# EAGLE board sensorstation_ok1 (EAGLE 6.2)
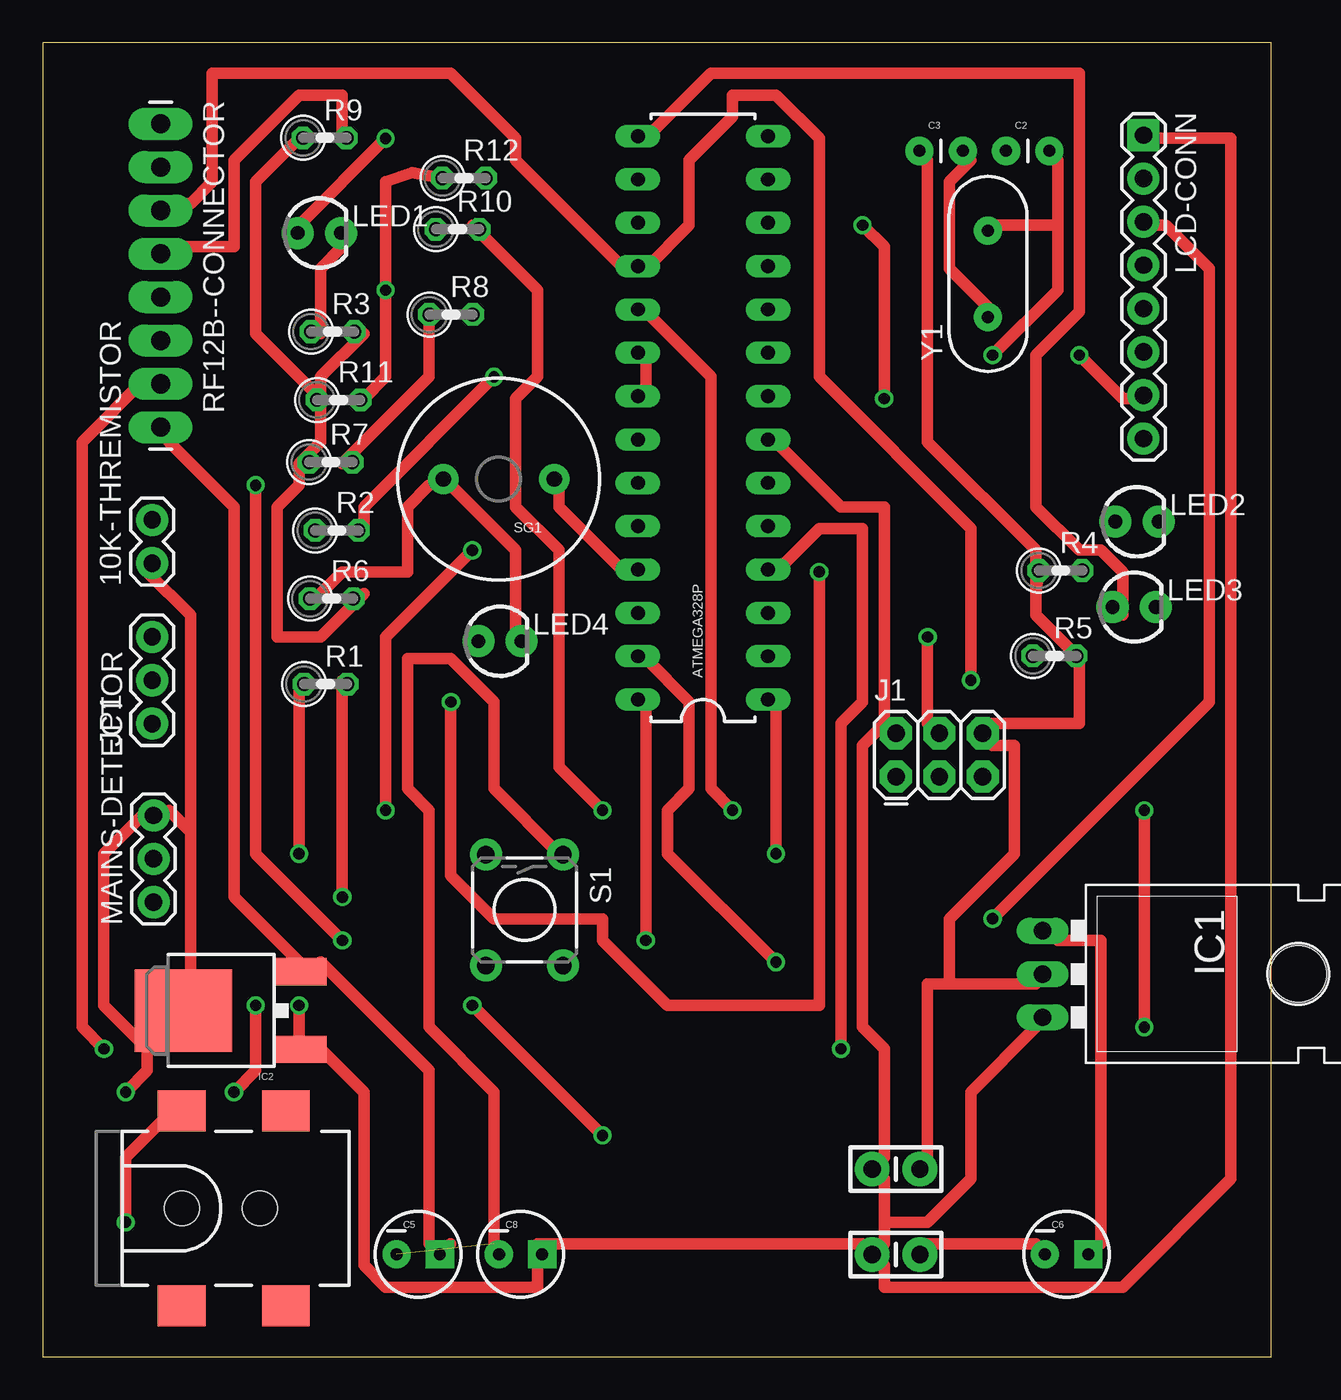
[diagram p0: board, top side]
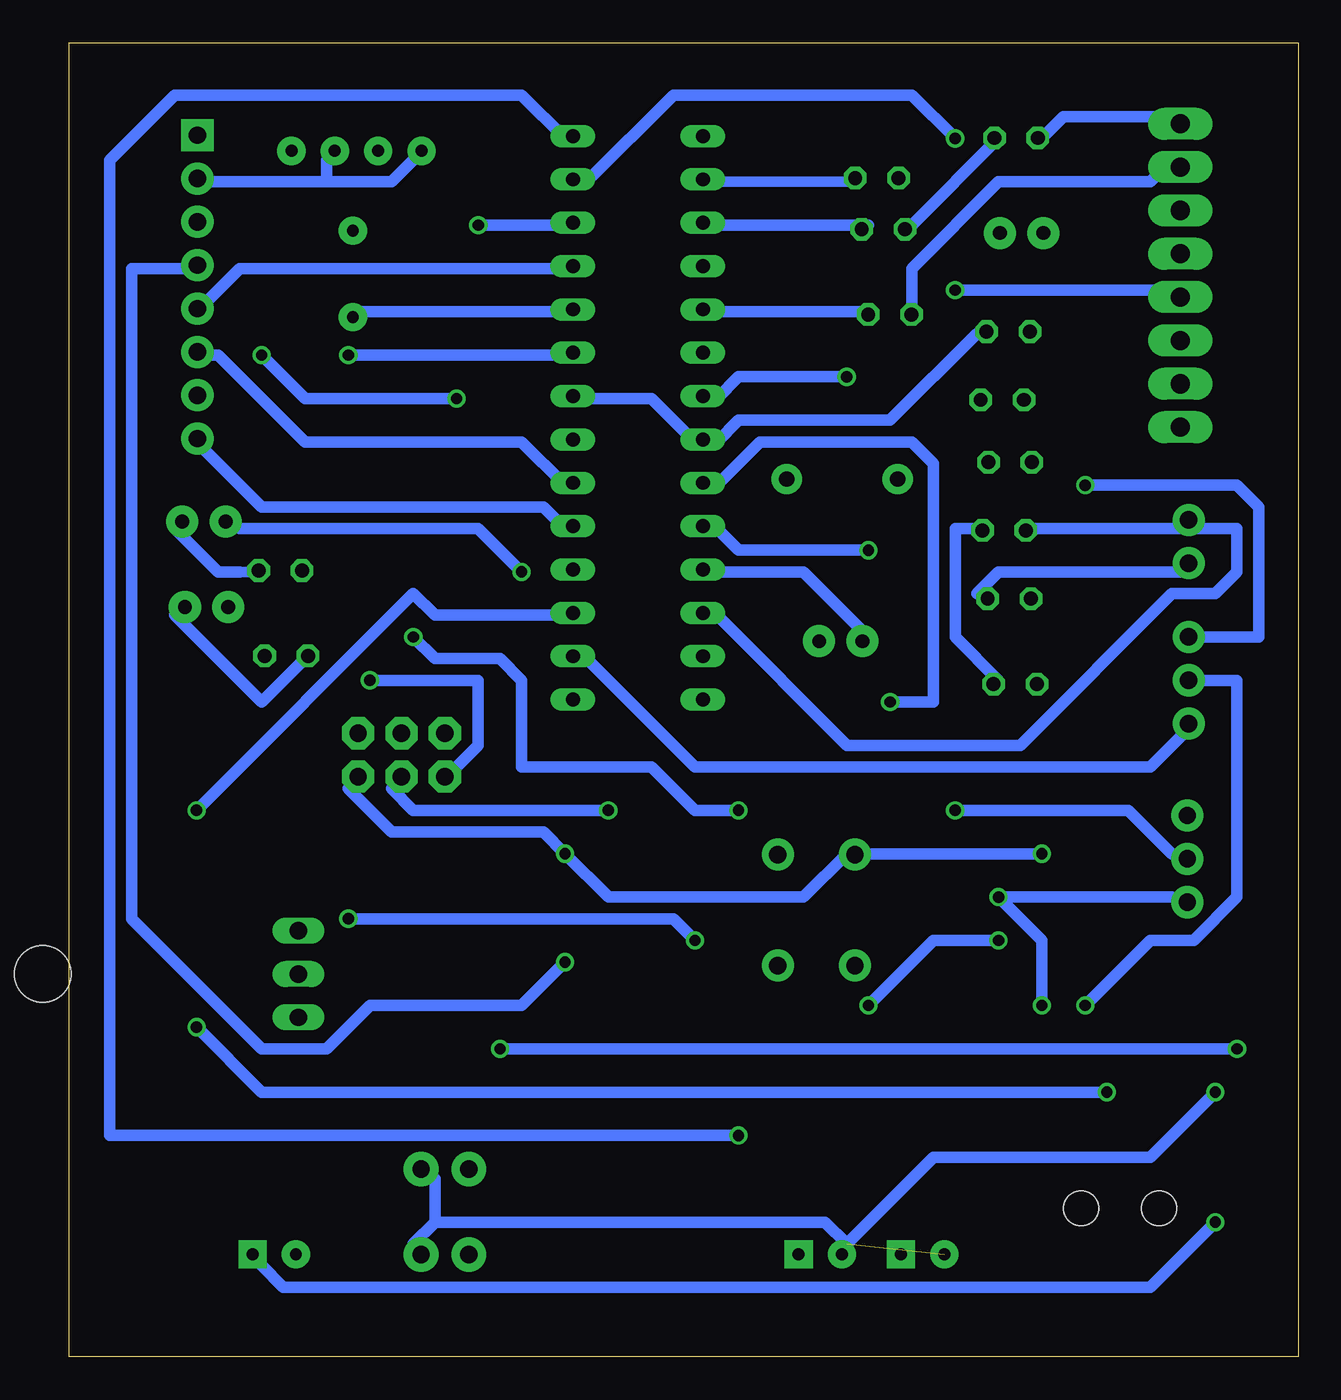
[diagram p1: board, bottom side, seen from below]

Size 72 x 77 mm. Coordinates in mm from the lower left corner, seen from the top.
Outline: 0,0 72,0 72,77 0,77 0,0
Copper layers (1*16): Top 0.035mm / dielectric 1.5mm / Bottom 0.035mm
Design rules: minimum track width 26mil, minimum drill 26mil, track to track 10mil, track to pad 20mil, pad to pad 10mil, via to via 20mil, smd to smd 8mil, copper to edge 40mil, drill to drill 8mil, minimum pad ring 10mil, minimum via ring 8mil, stop-mask expansion 4mil, vias tented up to drill 0mil, thermal gap 10mil

## Footprints (pad centres in the part's own frame; a part is rotated, then mirrored left to right if it is on the bottom)
1X02 = drill 1.016 pad 1.88: 1 0,0; 2 2.54,0
DIL28-3 = drill 0.813 long: 1 -16.51,-3.81; 2 -13.97,-3.81; 3 -11.43,-3.81; 4 -8.89,-3.81; 5 -6.35,-3.81; 6 -3.81,-3.81; 7 -1.27,-3.81; 8 1.27,-3.81; 9 3.81,-3.81; 10 6.35,-3.81; 11 8.89,-3.81; 12 11.43,-3.81; 13 13.97,-3.81; 14 16.51,-3.81; 15 16.51,3.81; 16 13.97,3.81; 17 11.43,3.81; 18 8.89,3.81; 19 6.35,3.81; 20 3.81,3.81; 21 1.27,3.81; 22 -1.27,3.81; 23 -3.81,3.81; 24 -6.35,3.81; 25 -8.89,3.81; 26 -11.43,3.81; 27 -13.97,3.81; 28 -16.51,3.81
CAP-PTH-SMALL = drill 0.7 pad 1.651: 1 0,0; 2 2.54,0
CAP-PTH-SMALL-KIT = drill 1.016 pad 2.032: 1 -1.397,0; 2 1.397,0
CPOL-RADIAL-10UF-25V = drill 0.7 pad 1.651 square: 1 1.27,0 | drill 0.7 pad 1.651: 2 -1.27,0
TO-220-ALT = drill 1.016 long: GND 0,-3.81; IN -2.54,-3.81; OUT 2.54,-3.81 | hole 3.302: 0,11.176
DPAK = smd 1.6 x 3: 1 -2.28,-5.31; 3 2.28,-5.31 | smd 4.826 x 5.715: 4 0,1.588
2X3 = drill 1.016 pad 1.88 octagon: 1 0,0; 2 0,2.54; 3 2.54,0; 4 2.54,2.54; 5 5.08,0; 6 5.08,2.54
POWER_JACK_SMD = smd 2.8 x 2.4: GND 0,-5.7; P$4 6.1,-5.7; VIN0 0,5.7; VIN1 6.1,5.7 | hole 2.032: 0,0; 4.572,0
1X03 = drill 1.016 pad 1.88: 1 0,0; 2 2.54,0; 3 5.08,0
1X08 = drill 1.016 pad 1.88 square: 1 0,0 | drill 1.016 pad 1.88: 2 2.54,0; 3 5.08,0; 4 7.62,0; 5 10.16,0; 6 12.7,0; 7 15.24,0; 8 17.78,0
LED3MM = drill 0.813 pad 1.88: A -1.27,0; K 1.27,0
0207/2V = drill 0.813 octagon: 1 -1.27,0; 2 1.27,0
1X08_LONGPADS = drill 1.118 pad 1.88 long: 1 0,0; 2 2.54,0; 3 5.08,0; 4 7.62,0; 5 10.16,0; 6 12.7,0; 7 15.24,0; 8 17.78,0
TACTILE-PTH = drill 1.016 pad 1.88: 1 -3.251,2.261; 2 3.251,2.261; 3 -3.251,-2.261; 4 3.251,-2.261
BUZZER-12MM = drill 0.9 pad 1.778: + 3.25,0; - -3.25,0
HC49US = drill 0.7 pad 1.651: 1 -2.54,0; 2 2.54,0

## Placement (x,y rotation side)
10K-THREMISTOR  J2  [1X02]  6.42,46.5 90 top
ATMEGA328P  AVR-MEGA8-PPTH  [DIL28-3]  38.69,55.02 90 top
C2  22pf  [CAP-PTH-SMALL]  56.45,70.66 0 top
C3  22pf  [CAP-PTH-SMALL]  51.37,70.66 0 top
C4  0,47uF  [CAP-PTH-SMALL-KIT]  50,11 0 top
C5  33uF  [CPOL-RADIAL-10UF-25V]  22,6 0 top
C6  33uF  [CPOL-RADIAL-10UF-25V]  60,6 0 top
C7  0,1uF  [CAP-PTH-SMALL-KIT]  50,6 0 top
C8  33uF  [CPOL-RADIAL-10UF-25V]  28,6 0 top
IC1  LM7805  [TO-220-ALT]  62.39,22.43 270 top
IC2  LM2931_FIXED  [DPAK]  9.83,20.29 90 top
J1  AVR_SPI_PRG_6PTH  [2X3]  50,34 0 top
J2  POWER_JACKSMD  [POWER_JACK_SMD]  8.15,8.7 0 top
JP1  J6  [1X03]  6.42,37.1 90 top
LCD-CONN  J5  [1X08]  64.5,71.58 270 top
LED1  MainsI  [LED3MM]  16.21,65.85 0 top
LED2  Led1  [LED3MM]  64.12,48.93 0 top
LED3  Led2  [LED3MM]  63.96,43.93 0 top
LED4  ToneLed  [LED3MM]  26.8,41.93 0 top
MAINS-DETECTOR  J3  [1X03]  6.5,26.64 90 top
R1  10k  [0207/2V]  16.58,39.42 0 top
R2  10k  [0207/2V]  17.23,48.42 0 top
R3  330  [0207/2V]  16.99,60.07 0 top
R4  330  [0207/2V]  59.64,46.07 0 top
R5  330  [0207/2V]  59.29,41.07 0 top
R6  330  [0207/2V]  16.93,44.42 0 top
R7  10k  [0207/2V]  16.88,52.42 0 top
R8  4,7k  [0207/2V]  23.93,61.07 0 top
R9  10k  [0207/2V]  16.53,71.42 0 top
R10  4,7k  [0207/2V]  24.31,66.07 0 top
R11  10k  [0207/2V]  17.34,56.07 0 top
R12  4,7k  [0207/2V]  24.69,69.07 0 top
RF12B--CONNECTOR  J4  [1X08_LONGPADS]  6.91,72.25 270 top
S1  [TACTILE-PTH]  28.23,26.18 270 top
SG1  BUZZERPTH  [BUZZER-12MM]  26.72,51.43 180 top
Y1  16Mhz  [HC49US]  55.39,63.45 90 top

## Library data of the parts
10K-THREMISTOR ATMEGA328P C2-C8 IC1 IC2 J1 J2 JP1 LCD-CONN LED1-LED4 MAINS-DETECTOR RF12B--CONNECTOR S1 SG1 Y1 = SparkFun
R1-R12 = resistor

## Nets
3.3V: C5.1 IC2.3 RF12B--CONNECTOR.8
5V: ATMEGA328P.7 ATMEGA328P.20 ATMEGA328P.21 C4.1 C7.1 C8.1 IC1.OUT IC2.1 J1.2 LCD-CONN.1 MAINS-DETECTOR.1 R1.2 R2.2
GND: 10K-THREMISTOR.1 ATMEGA328P.8 ATMEGA328P.22 C2.1 C3.1 C4.2 C5.2 C6.2 C7.2 C8.2 IC1.GND IC2.4 J1.6 LCD-CONN.2 MAINS-DETECTOR.3 R3.2 R4.1 R5.2 R6.2 R7.1 R9.1 R11.1 RF12B--CONNECTOR.1 S1.1
N$1: ATMEGA328P.4 RF12B--CONNECTOR.7
N$2: C6.1 IC1.IN J2.VIN0
N$3: ATMEGA328P.19 J1.3 R8.2
N$4: ATMEGA328P.17 J1.4 R10.2
N$6: ATMEGA328P.9 C2.2 Y1.2
N$7: ATMEGA328P.10 C3.2 Y1.1
N$8: ATMEGA328P.24 MAINS-DETECTOR.2
N$9: 10K-THREMISTOR.2 ATMEGA328P.26 R2.1
N$10: LED1.K R3.1
N$11: LED4.K R6.1 SG1.+
N$12: LED2.K R4.2
N$13: LED3.K R5.1
N$14: ATMEGA328P.23 LED2.A
N$15: ATMEGA328P.15 LED3.A
N$16: ATMEGA328P.25 LED4.A SG1.-
N$17: ATMEGA328P.14 JP1.3
N$18: R7.2 R8.1 RF12B--CONNECTOR.2
N$19: R9.2 R10.1 RF12B--CONNECTOR.4
N$20: R11.2 R12.1 RF12B--CONNECTOR.5
N$21: ATMEGA328P.16 R12.2
N$22: ATMEGA328P.13 LED1.A
N$23: ATMEGA328P.18 J1.1 RF12B--CONNECTOR.3
N$24: ATMEGA328P.12 LCD-CONN.7
N$25: ATMEGA328P.11 LCD-CONN.5
N$26: ATMEGA328P.6 LCD-CONN.6
N$27: ATMEGA328P.5 LCD-CONN.8
N$28: ATMEGA328P.3 JP1.2
N$29: ATMEGA328P.2 JP1.1
N$30: ATMEGA328P.27 LCD-CONN.4
N$31: ATMEGA328P.28 LCD-CONN.3
N$34: ATMEGA328P.1 J1.5 R1.1 S1.3

## Tracks (layer width: path | path; a pad name or v marks a point on that pad's centre or on a via)
3.3V
  Top 0.66: 23.91,6.62 C5.1 22.64,6.62 22.64,16.78 16.29,23.13 IC2.3 15.02,23.13 11.21,26.94 11.21,49.8 7.4,53.61 RF12B--CONNECTOR.8
5V  (via drill 0.66)
  Top 0.66: ATMEGA328P.21 35.34,56.15 35.34,58.69 ATMEGA328P.20 | v26.45,57.42 18.83,49.8 18.83,48.53 R2.2 | v17.56,26.94 17.56,39.64 R1.2 | 49.31,37.1 49.31,49.8 46.77,49.8 42.96,53.61 ATMEGA328P.7 | 49.31,7.89 51.85,7.89 54.39,10.43 54.39,15.51 58.2,19.32 IC1.OUT | 49.31,7.89 49.31,6.62 C7.1 | LCD-CONN.1 64.55,71.39 69.63,71.39 69.63,10.43 63.28,4.08 49.31,4.08 49.31,5.35 C7.1 | 49.31,7.89 49.31,10.43 C4.1 49.31,11.7 49.31,18.05 48.04,19.32 48.04,35.83 49.31,37.1 | 49.31,37.1 J1.2 | C7.1 48.04,6.62 28.99,6.62 C8.1 28.99,5.35 28.99,4.08 20.1,4.08 18.83,5.35 18.83,15.51 16.29,18.05 IC2.1 15.02,18.05 v15.02,20.59
  Bottom 0.66: R1.2 17.56,39.64 20.1,42.18 20.1,48.53 18.83,48.53 R2.2 | v26.45,57.42 32.8,57.42 34.07,56.15 ATMEGA328P.21 | MAINS-DETECTOR.1 7.4,26.94 v17.56,26.94 15.02,24.4 v15.02,20.59
GND  (via drill 0.66)  (1 unrouted)
  Top 0.66: 8.67,30.75 7.4,32.02 MAINS-DETECTOR.3 6.13,32.02 3.59,29.48 3.59,20.59 6.13,18.05 6.13,16.78 v4.86,15.51 | 8.67,30.75 8.67,20.59 IC2.4 | 8.67,30.75 8.67,43.45 6.13,45.99 10K-THREMISTOR.1 | 15.02,52.34 16.29,53.61 16.29,56.15 | 16.29,56.15 16.29,57.42 18.83,59.96 R3.2 | 16.29,56.15 12.48,59.96 12.48,68.85 15.02,71.39 R9.1 | 16.29,56.15 R11.1 | 15.02,52.34 15.02,51.07 13.75,49.8 13.75,42.18 16.29,42.18 18.83,44.72 R6.2 | 15.02,52.34 R7.1 | C6.2 58.2,6.62 51.85,6.62 C7.2 | S1.1 30.26,29.48 26.45,33.29 26.45,38.37 23.91,40.91 21.37,40.91 21.37,33.29 22.64,32.02 22.64,19.32 26.45,15.51 26.45,6.62 C8.2 | 60.74,40.91 58.2,43.45 58.2,44.72 | 60.74,40.91 60.74,37.1 55.66,37.1 J1.6 55.66,35.83 56.93,35.83 56.93,29.48 53.12,25.67 53.12,21.86 | 60.74,40.91 R5.2 | 53.12,21.86 51.85,21.86 51.85,11.7 C4.2 | 53.12,21.86 58.2,21.86 IC1.GND | 58.2,44.72 58.2,47.26 51.85,53.61 51.85,70.12 C3.1 | 58.2,44.72 R4.1
  Bottom 0.66: R6.2 18.83,44.72 17.56,45.99 6.13,45.99 10K-THREMISTOR.1 | R9.1 15.02,71.39 13.75,72.66 7.4,72.66 RF12B--CONNECTOR.1 | ATMEGA328P.8 41.69,56.15 37.88,56.15 35.34,53.61 ATMEGA328P.22 34.07,53.61 32.8,54.88 23.91,54.88 18.83,59.96 R3.2 | 26.45,6.62 27.72,7.89 50.58,7.89 | 50.58,7.89 51.85,6.62 C7.2 | 56.93,68.85 64.55,68.85 LCD-CONN.2 | 56.93,68.85 53.12,68.85 51.85,70.12 C3.1 | 56.93,68.85 56.93,70.12 C2.1 | 50.58,7.89 50.58,10.43 C4.2 | v4.86,15.51 8.67,11.7 21.37,11.7 26.45,6.62 | 26.45,6.62 C8.2
N$1  (via drill 0.66)
  Top 0.66: v46.77,18.05 46.77,37.1 48.04,38.37 48.04,48.53 45.5,48.53 42.96,45.99 ATMEGA328P.4 | v3.59,18.05 2.32,19.32 2.32,53.61 6.13,57.42 RF12B--CONNECTOR.7
  Bottom 0.66: v3.59,18.05 v46.77,18.05
N$2  (via drill 0.66)
  Top 0.66: v4.86,7.89 4.86,11.7 7.4,14.24 J2.VIN0 | IC1.IN 59.47,24.4 62.01,24.4 62.01,6.62 C6.1
  Bottom 0.66: v4.86,7.89 8.67,4.08 59.47,4.08 60.74,5.35 C6.1
N$3  (via drill 0.66)
  Top 0.66: v40.42,32.02 39.15,33.29 39.15,57.42 35.34,61.23 ATMEGA328P.19
  Bottom 0.66: R8.2 25.18,61.23 34.07,61.23 ATMEGA328P.19 | v40.42,32.02 51.85,32.02 53.12,33.29 J1.3
N$4  (via drill 0.66)
  Top 0.66: v51.85,42.18 51.85,37.1 J1.4 | v32.8,32.02 30.26,34.56 30.26,47.26 27.72,49.8 27.72,56.15 28.99,57.42 28.99,62.5 25.18,66.31 R10.2
  Bottom 0.66: R10.2 25.18,66.31 34.07,66.31 ATMEGA328P.17 | v51.85,42.18 50.58,40.91 46.77,40.91 45.5,39.64 45.5,34.56 37.88,34.56 35.34,32.02 v32.8,32.02
N$6  (via drill 0.66)
  Top 0.66: v55.66,58.69 59.47,62.5 59.47,66.31 | 59.47,66.31 59.47,70.12 C2.2 | 59.47,66.31 55.66,66.31 Y1.2
  Bottom 0.66: v55.66,58.69 42.96,58.69 ATMEGA328P.9
N$7
  Top 0.66: C3.2 54.39,70.12 53.12,68.85 53.12,63.77 55.66,61.23 Y1.1
  Bottom 0.66: ATMEGA328P.10 42.96,61.23 55.66,61.23 Y1.1
N$8  (via drill 0.66)
  Top 0.66: v25.18,47.26 20.1,42.18 v20.1,32.02
  Bottom 0.66: v25.18,47.26 32.8,47.26 34.07,48.53 ATMEGA328P.24 | v20.1,32.02 9.94,32.02 7.4,29.48 MAINS-DETECTOR.2
N$9
  Bottom 0.66: 6.13,48.53 16.29,48.53 R2.1 | 6.13,48.53 3.59,48.53 3.59,45.99 4.86,44.72 7.4,44.72 16.29,35.83 26.45,35.83 34.07,43.45 ATMEGA328P.26 | 6.13,48.53 10K-THREMISTOR.2
N$10
  Top 0.66: R3.1 16.29,59.96 16.29,63.77 17.56,65.04 LED1.K
N$11
  Top 0.66: R6.1 16.29,44.72 17.56,45.99 21.37,45.99 21.37,49.8 22.64,51.07 SG1.+ 23.91,51.07 27.72,47.26 27.72,42.18 LED4.K
N$12
  Bottom 0.61: 62.01,45.99 60.91,45.99 R4.2
  Bottom 0.66: 62.01,45.99 63.28,45.99 65.82,48.53 LED2.K
N$13
  Bottom 0.66: R5.1 58.2,40.91 60.74,38.37 65.82,43.45 LED3.K
N$14  (via drill 0.66)
  Top 0.66: v23.91,38.37 23.91,28.21 26.45,25.67 32.8,25.67 32.8,24.4 36.61,20.59 45.5,20.59 v45.5,45.99
  Bottom 0.66: v23.91,38.37 21.37,38.37 21.37,52.34 22.64,53.61 31.53,53.61 34.07,51.07 ATMEGA328P.23 | v45.5,45.99 48.04,48.53 62.01,48.53 LED2.A
N$15
  Top 0.66: ATMEGA328P.15 35.34,71.39 39.15,75.2 60.74,75.2 60.74,61.23 58.2,58.69 58.2,49.8 60.74,47.26 62.01,47.26 63.28,45.99 63.28,43.45 LED3.A
N$16
  Top 0.66: ATMEGA328P.25 34.07,45.99 30.26,49.8 30.26,51.07 SG1.-
  Bottom 0.66: LED4.A 25.18,42.18 28.99,45.99 34.07,45.99 ATMEGA328P.25
N$17  (via drill 0.66)
  Top 0.66: v25.18,20.59 v32.8,12.97 | v17.56,24.4 12.48,29.48 v12.48,51.07
  Bottom 0.66: v32.8,12.97 69.63,12.97 69.63,70.12 65.82,73.93 45.5,73.93 42.96,71.39 ATMEGA328P.14 | v25.18,20.59 21.37,24.4 v17.56,24.4 | v12.48,51.07 3.59,51.07 2.32,49.8 2.32,42.18 JP1.3
N$18
  Top 0.66: R7.2 17.56,52.34 22.64,57.42 22.64,61.23 R8.1
  Bottom 0.66: RF12B--CONNECTOR.2 7.4,70.12 8.67,68.85 17.56,68.85 22.64,63.77 22.64,61.23 R8.1
N$19
  Top 0.66: RF12B--CONNECTOR.4 7.4,65.04 11.21,65.04 11.21,70.12 15.02,73.93 17.56,73.93 17.56,71.39 R9.2
  Bottom 0.66: R10.1 22.64,66.31 17.56,71.39 R9.2
N$20  (via drill 0.66)
  Top 0.66: R11.2 18.83,56.15 20.1,57.42 v20.1,62.5 20.1,68.85 21.64,69.39 R12.1
  Bottom 0.66: v20.1,62.5 7.4,62.5 RF12B--CONNECTOR.5
N$21
  Bottom 0.61: 34.07,68.85 25.96,68.85 R12.2
  Bottom 0.66: 34.07,68.85 ATMEGA328P.16
N$22  (via drill 0.66)
  Top 0.66: v20.1,71.39 15.02,66.31 LED1.A
  Bottom 0.66: v20.1,71.39 22.64,73.93 36.61,73.93 41.69,68.85 ATMEGA328P.13
N$23  (via drill 0.66)
  Top 0.66: RF12B--CONNECTOR.3 7.4,67.58 8.67,67.58 9.94,68.85 9.94,75.2 23.91,75.2 27.72,71.39 27.72,70.12 34.07,63.77 ATMEGA328P.18 35.34,63.77 37.88,66.31 37.88,70.12 40.42,72.66 40.42,73.93 42.96,73.93 45.5,71.39 45.5,57.42 54.39,48.53 v54.39,39.64
  Bottom 0.66: v54.39,39.64 48.04,39.64 48.04,35.83 49.31,34.56 J1.1
N$24  (via drill 0.66)
  Top 0.66: v48.04,66.31 49.31,65.04 v49.31,56.15 | v60.74,58.69 63.28,56.15 64.55,56.15 LCD-CONN.7
  Bottom 0.66: v48.04,66.31 42.96,66.31 ATMEGA328P.12 | v49.31,56.15 58.2,56.15 v60.74,58.69
N$25
  Bottom 0.66: ATMEGA328P.11 42.96,63.77 62.01,63.77 64.55,61.23 LCD-CONN.5
N$26
  Bottom 0.66: ATMEGA328P.6 42.96,51.07 45.5,53.61 58.2,53.61 63.28,58.69 64.55,58.69 LCD-CONN.6
N$27
  Bottom 0.66: ATMEGA328P.5 42.96,48.53 44.23,49.8 60.74,49.8 64.55,53.61 LCD-CONN.8
N$28  (via drill 0.66)
  Top 0.66: v64.55,19.32 v64.55,32.02 | v11.21,15.51 12.48,16.78 v12.48,20.59
  Bottom 0.66: v64.55,32.02 51.85,44.72 50.58,43.45 42.96,43.45 ATMEGA328P.3 | v64.55,19.32 60.74,15.51 v11.21,15.51 | v12.48,20.59 8.67,24.4 6.13,24.4 3.59,26.94 3.59,39.64 JP1.2
N$29
  Bottom 0.66: ATMEGA328P.2 41.69,40.91 35.34,34.56 8.67,34.56 6.13,37.1 JP1.1
N$30  (via drill 0.66)
  Top 0.66: v42.96,23.13 36.61,29.48 36.61,32.02 37.88,33.29 37.88,38.37 35.34,40.91 ATMEGA328P.27
  Bottom 0.66: v42.96,23.13 45.5,20.59 54.39,20.59 56.93,18.05 60.74,18.05 68.36,25.67 68.36,63.77 64.55,63.77 LCD-CONN.4
N$31  (via drill 0.66)
  Top 0.66: v35.34,24.4 35.34,38.37 ATMEGA328P.28 | v55.66,25.67 68.36,38.37 68.36,63.77 65.82,66.31 64.55,66.31 LCD-CONN.3
  Bottom 0.66: v35.34,24.4 36.61,25.67 v55.66,25.67
N$34  (via drill 0.66)
  Top 0.66: v42.96,29.48 42.96,38.37 ATMEGA328P.1 | v15.02,29.48 15.02,39.64 R1.1
  Bottom 0.66: J1.5 55.66,33.29 53.12,30.75 44.23,30.75 v42.96,29.48 40.42,26.94 28.99,26.94 26.45,29.48 S1.3 25.18,29.48 v15.02,29.48